# EAGLE board PiedPiperPCB (EAGLE 9.7.0)
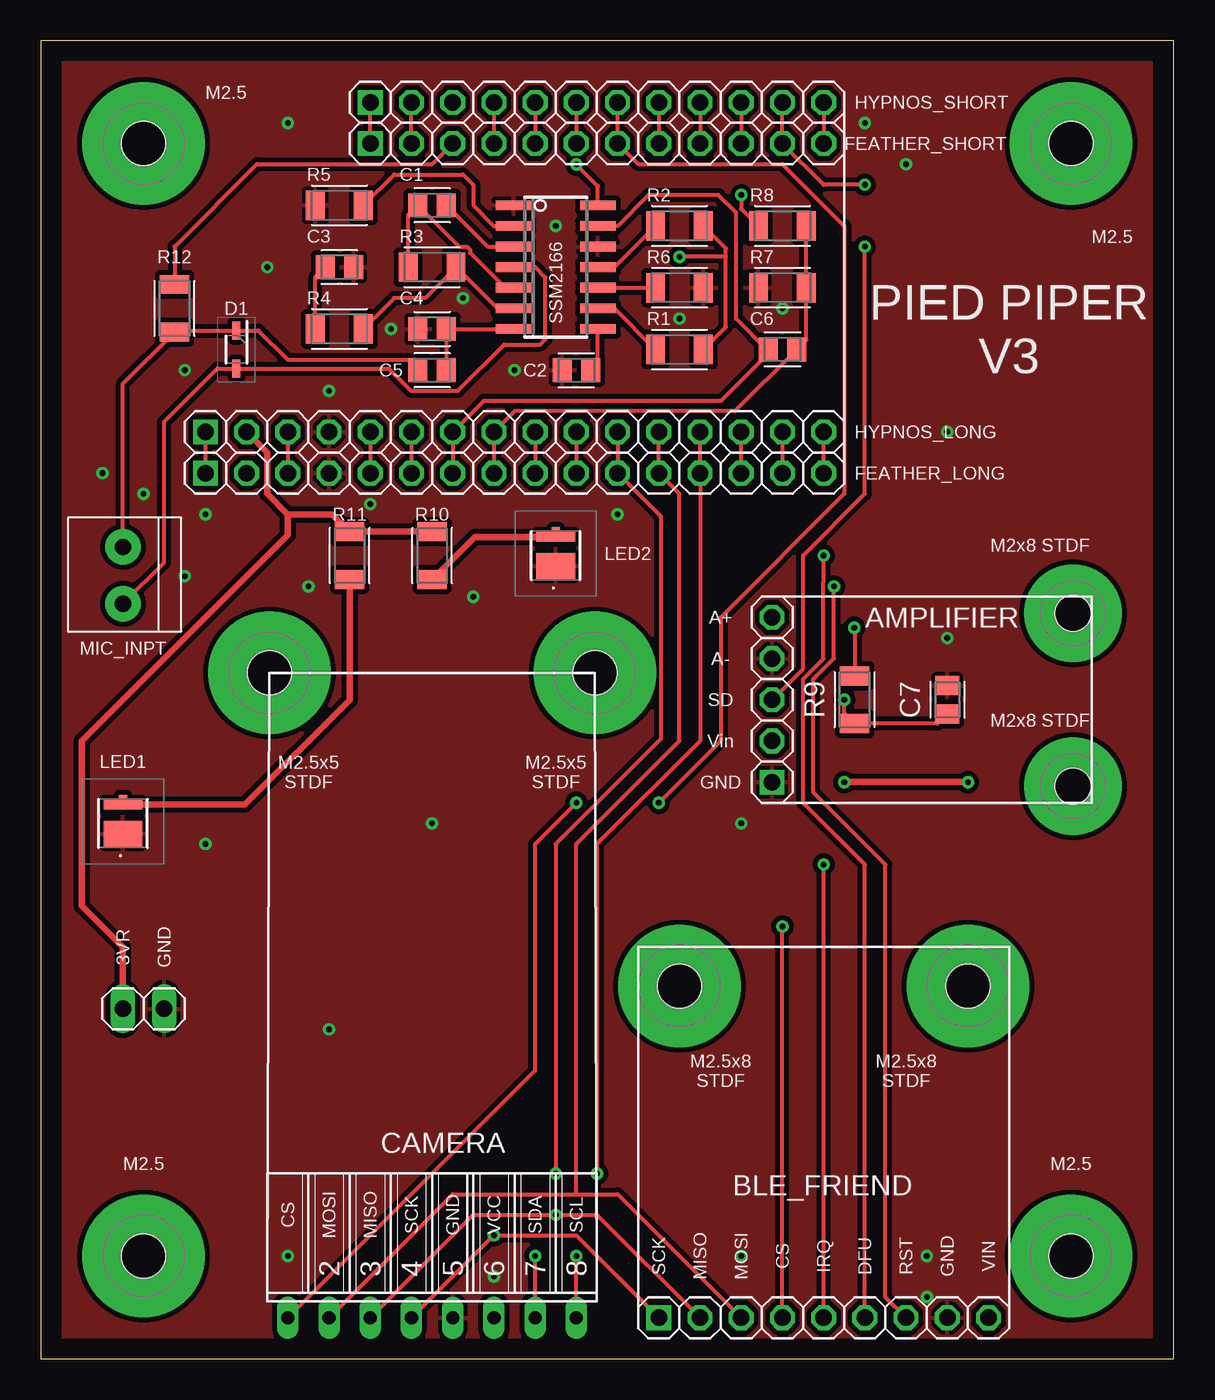
[diagram p0: board, top side]
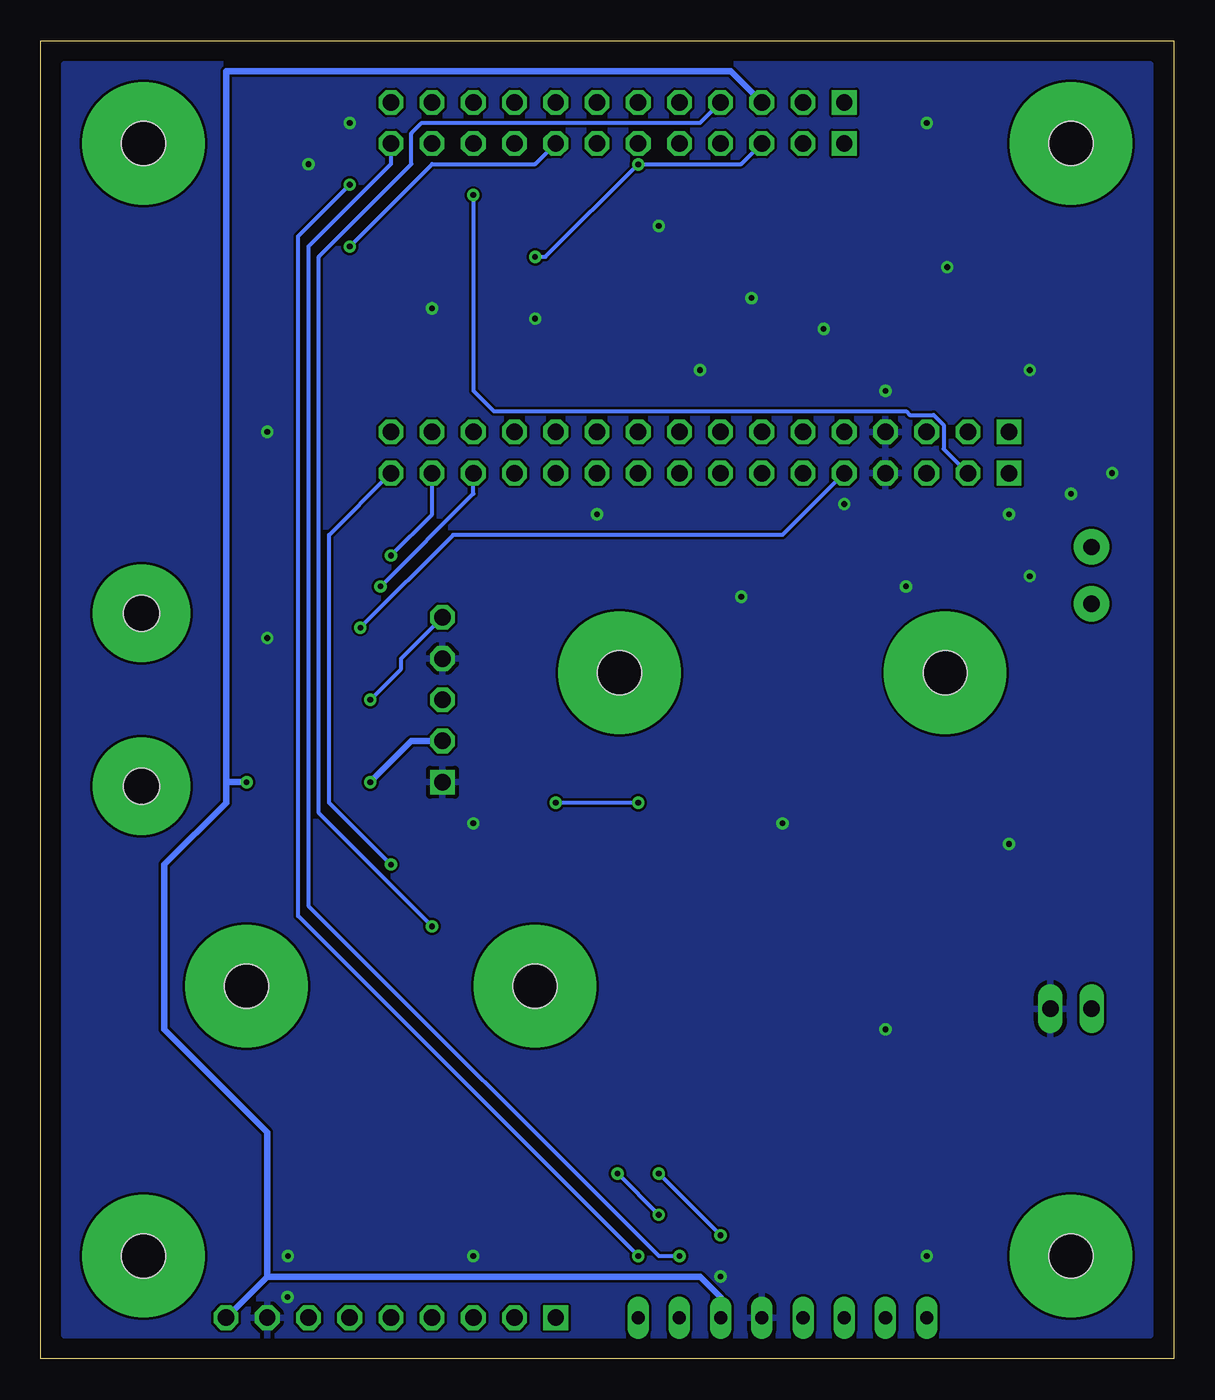
[diagram p1: board, bottom side, seen from below]

Size 69.85 x 81.28 mm. Coordinates in mm from the lower left corner, seen from the top.
Outline: 0,81.28 0,0 69.85,0 69.85,81.28 0,81.28
Copper layers (1*16): Top 0.035mm / dielectric 1.5mm / Bottom 0.035mm
Design rules "default": minimum track width 6mil, minimum drill 0.35mm, track to track 6mil, track to pad 6mil, pad to pad 6mil, via to via 6mil, smd to smd 6mil, copper to edge 40mil, drill to drill 6mil, minimum pad ring 10mil, minimum via ring 8mil, stop-mask expansion 4mil, vias tented up to drill 0mil, thermal gap 10mil

## Footprints (pad centres in the part's own frame; a part is rotated, then mirrored left to right if it is on the bottom)
1X02 = drill 1.016 long: 1 -1.27,0; 2 1.27,0
1X05-S = drill 1.016 square: 1 -5.08,0 | drill 1.016 octagon: 2 -2.54,0; 3 0,0; 4 2.54,0; 5 5.08,0
1X09-S = drill 1.016 square: 1 -10.16,0 | drill 1.016 octagon: 2 -7.62,0; 3 -5.08,0; 4 -2.54,0; 5 0,0; 6 2.54,0; 7 5.08,0; 8 7.62,0; 9 10.16,0
CAPC2012X110 = smd 1.165 x 1.465: 1 -0.875,0; 2 0.875,0
FE08W = drill 0.813 long: 1 -8.89,0; 2 -6.35,0; 3 -3.81,0; 4 -1.27,0; 5 1.27,0; 6 3.81,0; 7 6.35,0; 8 8.89,0
SOD2613X100N = smd 1.1 x 0.5: 1 -1.175,0; 2 1.175,0
1X16-S = drill 1.016 square: 1 -19.05,0 | drill 1.016 octagon: 2 -16.51,0; 3 -13.97,0; 4 -11.43,0; 5 -8.89,0; 6 -6.35,0; 7 -3.81,0; 8 -1.27,0; 9 1.27,0; 10 3.81,0; 11 6.35,0; 12 8.89,0; 13 11.43,0; 14 13.97,0; 15 16.51,0; 16 19.05,0
1X12-S = drill 1.016 square: 1 -13.97,0 | drill 1.016 octagon: 2 -11.43,0; 3 -8.89,0; 4 -6.35,0; 5 -3.81,0; 6 -1.27,0; 7 1.27,0; 8 3.81,0; 9 6.35,0; 10 8.89,0; 11 11.43,0; 12 13.97,0
MP3030120H2290 = smd 1.6 x 2.4: 1 -0.65,0 | smd 0.6 x 2.4: 2 1.15,0 | smd 0.3 x 0.5: 3 1.6,0
STANDOFF_HEX_MALE-FEMALE_500X500_M2.5X0.45_MTGP755H270 = drill 2.7 pad 7.55: 1 0,0 | hole 2.7: 0,0
1X2-3.5MM = drill 1 pad 2.184: 1 1.8,0; 2 -1.7,0
SO14 = smd 0.6 x 2.2: 1 -3.81,-2.6; 2 -2.54,-2.6; 3 -1.27,-2.6; 4 0,-2.6; 5 1.27,-2.6; 6 2.54,-2.6; 7 3.81,-2.6; 8 3.81,2.6; 9 2.54,2.6; 10 1.27,2.6; 11 0,2.6; 12 -1.27,2.6; 13 -2.54,2.6; 14 -3.81,2.6
STANDOFF_HEX_MALE-FEMALE_500X800_M2.5X0.45_MTGP755H270 = drill 2.7 pad 7.55: 1 0,0 | hole 2.7: 0,0
STANDOFF_HEX_MALE-FEMALE_400X800_M2X0.4_MTGP600H220 = drill 2.2 pad 6: 1 0,0 | hole 2.2: 0,0
RESC3216X70 = smd 1.165 x 1.815: 1 -1.475,0; 2 1.475,0

## Placement (x,y rotation side)
3VR  [1X02]  6.35,21.59 0 top
AMPLIFIER  [1X05-S]  45.09,40.64 90 top
BLE_FRIEND  [1X09-S]  48.26,2.54 0 top
C1  [CAPC2012X110]  24.13,71.12 0 top
C2  [CAPC2012X110]  33.02,60.96 180 top
C3  [CAPC2012X110]  18.41,67.31 0 top
C4  [CAPC2012X110]  24.13,63.5 180 top
C5  [CAPC2012X110]  24.13,60.96 0 top
C6  [CAPC2012X110]  45.72,62.23 0 top
C7  [CAPC2012X110]  55.88,40.64 90 top
CAMERA  [FE08W]  24.13,2.54 0 top
D1  STS321033B100  [SOD2613X100N]  12.06,62.23 270 top
FEATHER_LONG  [1X16-S]  29.21,54.61 0 top
FEATHER_SHORT  [1X12-S]  34.29,74.93 0 top
HYPNOS_LONG  [1X16-S]  29.21,57.15 0 top
HYPNOS_SHORT  [1X12-S]  34.29,77.47 0 top
LED1  MP-3030-120H-22-90  [MP3030120H2290]  5.08,33.02 90 top
LED2  MP-3030-120H-22-90  [MP3030120H2290]  31.75,49.53 90 top
M2.5_STDF_1  STANDOFF_M/F_M2.5_5MM  [STANDOFF_HEX_MALE-FEMALE_500X500_M2.5X0.45_MTGP755H270]  14.1,42.29 270 top
M2.5_STDF_2  STANDOFF_M/F_M2.5_5MM  [STANDOFF_HEX_MALE-FEMALE_500X500_M2.5X0.45_MTGP755H270]  34.16,42.29 270 top
MIC_INPT  1X2-3.5MM  [1X2-3.5MM]  5.08,48.26 90 top
MICROPHONE_PREAMP  SSM2166S  [SO14]  31.75,67.31 270 top
MP3  STANDOFF_M/F_M2.5_8MM  [STANDOFF_HEX_MALE-FEMALE_500X800_M2.5X0.45_MTGP755H270]  57.15,22.99 270 top
MP4  STANDOFF_M/F_M2.5_8MM  [STANDOFF_HEX_MALE-FEMALE_500X800_M2.5X0.45_MTGP755H270]  39.37,22.99 270 top
MP5  STANDOFF_M/F_M2_8MM  [STANDOFF_HEX_MALE-FEMALE_400X800_M2X0.4_MTGP600H220]  63.63,35.31 90 top
MP6  STANDOFF_M/F_M2_8MM  [STANDOFF_HEX_MALE-FEMALE_400X800_M2X0.4_MTGP600H220]  63.63,45.97 90 top
MP7  STANDOFF_M/F_M2.5_5MM  [STANDOFF_HEX_MALE-FEMALE_500X500_M2.5X0.45_MTGP755H270]  63.5,6.35 0 top
MP8  STANDOFF_M/F_M2.5_5MM  [STANDOFF_HEX_MALE-FEMALE_500X500_M2.5X0.45_MTGP755H270]  6.35,6.35 0 top
MP9  STANDOFF_M/F_M2.5_5MM  [STANDOFF_HEX_MALE-FEMALE_500X500_M2.5X0.45_MTGP755H270]  6.35,74.93 0 top
MP10  STANDOFF_M/F_M2.5_5MM  [STANDOFF_HEX_MALE-FEMALE_500X500_M2.5X0.45_MTGP755H270]  63.5,74.93 0 top
R1  [RESC3216X70]  39.37,62.23 180 top
R2  [RESC3216X70]  39.37,69.85 180 top
R3  [RESC3216X70]  24.13,67.31 180 top
R4  [RESC3216X70]  18.41,63.5 180 top
R5  [RESC3216X70]  18.41,71.12 180 top
R6  [RESC3216X70]  39.37,66.04 0 top
R7  [RESC3216X70]  45.72,66.04 0 top
R8  [RESC3216X70]  45.72,69.85 180 top
R9  [RESC3216X70]  50.16,40.64 90 top
R10  [RESC3216X70]  24.13,49.53 270 top
R11  [RESC3216X70]  19.05,49.53 270 top
R12  [RESC3216X70]  8.26,64.77 270 top

## Library data of the parts
3VR = pinhead
AMPLIFIER BLE_FRIEND FEATHER_LONG FEATHER_SHORT HYPNOS_LONG HYPNOS_SHORT = pinhead-2
C1-C7 = Capacitor; CATEGORY: Capacitor
CAMERA = con-lsta; OC_FARNELL: unknown; OC_NEWARK: unknown
D1 = SamacSys_Parts; DESCRIPTION: ESD Suppressors / TVS Diodes TVS ESD SOD-323 3.3 V; HEIGHT: 1mm; MANUFACTURER_NAME: Eaton; MANUFACTURER_PART_NUMBER: STS321033B100
LED1 LED2 = SamacSys_Parts; DESCRIPTION: High Power LEDs - White White 2200K ,90CRI; HEIGHT: 0.71mm; MANUFACTURER_NAME: Luminus Devices Inc.; MANUFACTURER_PART_NUMBER: MP-3030-120H-22-90; MOUSER_PART_NUMBER: 896-MP303012H2290; MOUSER_PRICE-STOCK: https://www.mouser.co.uk/ProductDetail/Luminus-Devices/MP-3030-120H-22-90?qs=iLbezkQI%252BsghKpkN4HJWNA%3D%3D
M2.5_STDF_1 M2.5_STDF_2 MP3-MP10 = PCB-Fasteners_Hardware; CATEGORY: Standoff/Spacer; SUB-CATEGORY: Male-Female
MIC_INPT = adafruit
MICROPHONE_PREAMP = analog-devices; MF: ALTERA CORPORATION; MPN: SSM2166S-REEL; OC_FARNELL: 1424669; OC_NEWARK: 13B4818
R1-R12 = Resistor; CATEGORY: Resistor; SUB-CATEGORY: Fixed

## Nets
0/RX: BLE_FRIEND.7 FEATHER_LONG.14 HYPNOS_LONG.14
1/TX: BLE_FRIEND.6 FEATHER_LONG.15 HYPNOS_LONG.15
4: BLE_FRIEND.5 FEATHER_LONG.16 HYPNOS_LONG.16
5/(HYPNOS_3VR-CTRL): FEATHER_SHORT.10 HYPNOS_SHORT.10
6/(HYPNOS_5VR-CTRL): FEATHER_SHORT.9 HYPNOS_SHORT.9
9: AMPLIFIER.3 FEATHER_SHORT.8 HYPNOS_SHORT.8
10: CAMERA.1 FEATHER_SHORT.7 HYPNOS_SHORT.7
11/(HYPNOS_SD-CS): FEATHER_SHORT.6 HYPNOS_SHORT.6
12/(HYPNOS_INT): FEATHER_SHORT.5 HYPNOS_SHORT.5
13: BLE_FRIEND.4 FEATHER_SHORT.4 HYPNOS_SHORT.4
A0: FEATHER_LONG.5 HYPNOS_LONG.5 R9.2
A1: FEATHER_LONG.6 HYPNOS_LONG.6
A2: C6.1 FEATHER_LONG.7 HYPNOS_LONG.7 MICROPHONE_PREAMP.13
A3: C6.2 FEATHER_LONG.8 HYPNOS_LONG.8 R7.2 R8.1
A4: FEATHER_LONG.9 HYPNOS_LONG.9
A5: FEATHER_LONG.10 HYPNOS_LONG.10
AVGCAP: C2.1 MICROPHONE_PREAMP.8
BAT: FEATHER_SHORT.1 HYPNOS_SHORT.1
BUFOUT: C1.1 MICROPHONE_PREAMP.5 R3.2
COMP: MICROPHONE_PREAMP.10 R6.1
EN: FEATHER_SHORT.2 HYPNOS_SHORT.2
FEATHER_3V: FEATHER_LONG.2 R8.2
FEATHER_5V: FEATHER_SHORT.3 MICROPHONE_PREAMP.14 R1.1 R2.1 R12.1
FEATHER_AREF: FEATHER_LONG.3 HYPNOS_LONG.3
GND: 3VR.2 AMPLIFIER.1 AMPLIFIER.4 BLE_FRIEND.8 C2.2 C3.2 C4.2 C7.2 CAMERA.5 FEATHER_LONG.4 HYPNOS_LONG.4 LED1.1 LED2.1 MICROPHONE_PREAMP.1 MICROPHONE_PREAMP.12 R5.2 R6.2 R7.1
HYPNOS_3VR: 3VR.1 HYPNOS_LONG.2 R10.1 R11.1
HYPNOS_5VR: AMPLIFIER.2 BLE_FRIEND.9 CAMERA.6 HYPNOS_SHORT.3
IN+: C4.1 C5.2 MICROPHONE_PREAMP.7
IN-: MICROPHONE_PREAMP.6 R3.1 R4.1
MIC+: C5.1 D1.1 MIC_INPT.1 R12.2
MIC-: D1.2 MIC_INPT.2 MICROPHONE_PREAMP.4
MISO: BLE_FRIEND.2 CAMERA.3 FEATHER_LONG.13 HYPNOS_LONG.13
MOSI: BLE_FRIEND.3 CAMERA.2 FEATHER_LONG.12 HYPNOS_LONG.12
N$1: LED1.2 LED1.3 R11.2
N$8: C3.1 R4.2
N$14: AMPLIFIER.5 C7.1 R9.1
N$15: LED2.2 LED2.3 R10.2
RGAIN: MICROPHONE_PREAMP.2 R5.1
RNOISE: MICROPHONE_PREAMP.9 R1.2
RROT: MICROPHONE_PREAMP.11 R2.2
RST: FEATHER_LONG.1 HYPNOS_LONG.1
SCK: BLE_FRIEND.1 CAMERA.4 FEATHER_LONG.11 HYPNOS_LONG.11
SCL: CAMERA.8 FEATHER_SHORT.11 HYPNOS_SHORT.11
SDA: CAMERA.7 FEATHER_SHORT.12 HYPNOS_SHORT.12
VCAIN: C1.2 MICROPHONE_PREAMP.3

## Tracks (layer width: path | path; a pad name or v marks a point on that pad's centre or on a via)
0/RX  (via drill 0.35)
  Top 0.254: FEATHER_LONG.14 HYPNOS_LONG.14 | BLE_FRIEND.7 52.07,3.81 52.07,30.48 47.62,34.92 47.62,41.91 48.9,43.18 v48.9,47.62
  Bottom 0.254: v48.9,47.62 43.18,53.34 FEATHER_LONG.14
1/TX  (via drill 0.35)
  Top 0.254: HYPNOS_LONG.15 FEATHER_LONG.15 | BLE_FRIEND.6 50.8,30.48 46.99,34.29 46.99,41.91 48.24,43.16 48.24,47.9 48.26,47.92 v48.26,49.53
  Bottom 0.254: v48.26,49.53 45.72,52.07 FEATHER_LONG.15
4  (via drill 0.35)
  Top 0.254: FEATHER_LONG.16 HYPNOS_LONG.16 | BLE_FRIEND.5 v48.26,30.48
  Bottom 0.254: v48.26,30.48 52.07,34.29 52.07,50.8 FEATHER_LONG.16
5/(HYPNOS_3VR-CTRL)
  Top 0.254: HYPNOS_SHORT.10 FEATHER_SHORT.10
6/(HYPNOS_5VR-CTRL)
  Top 0.254: HYPNOS_SHORT.9 FEATHER_SHORT.9
9  (via drill 0.35)
  Top 0.254: HYPNOS_SHORT.8 FEATHER_SHORT.8 | AMPLIFIER.3 46.99,42.55 46.99,49.53 50.8,53.34 v50.8,68.58
  Bottom 0.254: v50.8,68.58 45.72,73.66 39.37,73.66 FEATHER_SHORT.8
10  (via drill 0.35)
  Top 0.254: HYPNOS_SHORT.7 FEATHER_SHORT.7 36.83,73.66 45.72,73.66 49.53,69.85 49.53,53.34 41.91,45.72 41.91,38.1 v38.1,34.29 | CAMERA.1 30.48,17.78 30.48,31.75 v33.02,34.29
  Bottom 0.254: v33.02,34.29 v38.1,34.29
11/(HYPNOS_SD-CS)
  Top 0.254: HYPNOS_SHORT.6 FEATHER_SHORT.6
12/(HYPNOS_INT)
  Top 0.254: HYPNOS_SHORT.5 FEATHER_SHORT.5
13  (via drill 0.35)
  Top 0.254: HYPNOS_SHORT.4 FEATHER_SHORT.4 | BLE_FRIEND.4 v45.72,26.67
  Bottom 0.254: v45.72,26.67 52.7,33.66 52.7,67.94 46.99,73.66 46.99,75.56 46.35,76.2 29.21,76.2 HYPNOS_SHORT.4
A0  (via drill 0.35)
  Top 0.254: HYPNOS_LONG.5 FEATHER_LONG.5 | v50.14,45.09 50.16,45.06 R9.2
  Bottom 0.254: FEATHER_LONG.5 24.13,50.8 44.43,50.8 v50.14,45.09
A1
  Top 0.254: HYPNOS_LONG.6 FEATHER_LONG.6
A2
  Top 0.254: MICROPHONE_PREAMP.13 35.56,69.85 37.47,71.75 41.77,71.75 42.86,70.66 42.86,64.14 44.77,62.23 C6.1 44.84,61.99 41.91,59.05 27.3,59.05 HYPNOS_LONG.7 FEATHER_LONG.7
A3
  Top 0.254: R8.1 R7.2 47.2,62.83 C6.2 42.78,58.42 29.21,58.42 HYPNOS_LONG.8 FEATHER_LONG.8
A4
  Top 0.254: HYPNOS_LONG.9 FEATHER_LONG.9
A5
  Top 0.254: HYPNOS_LONG.10 FEATHER_LONG.10
AVGCAP
  Top 0.254: C2.1 34.35,61.41 MICROPHONE_PREAMP.8
BAT
  Top 0.254: FEATHER_SHORT.1 HYPNOS_SHORT.1
BUFOUT
  Top 0.254: MICROPHONE_PREAMP.5 28.62,66.04 26.47,68.2 26.47,68.4 26.3,68.56 25.82,68.56 C1.1 22.66,70.52 R3.2
COMP
  Top 0.254: MICROPHONE_PREAMP.10 R6.1
EN
  Top 0.254: FEATHER_SHORT.2 HYPNOS_SHORT.2
FEATHER_3V  (via drill 0.35)
  Top 0.254: v43.18,71.75 43.18,70.92 R8.2
  Bottom 0.254: v43.18,71.75 43.18,59.69 41.91,58.42 16.51,58.42 16.28,58.19 14.81,58.19 14.2,57.58 14.2,56.11 FEATHER_LONG.2
FEATHER_5V  (via drill 0.35)
  Top 0.254: FEATHER_SHORT.3 24.13,73.66 13.34,73.66 8.26,68.58 R12.1 | R1.1 42.23,63.61 42.23,67.94 | 42.23,67.94 42.23,68.47 R2.1 | 42.23,67.94 v39.37,67.94 | MICROPHONE_PREAMP.14 34.35,72.31 v33.02,73.64
  Bottom 0.254: FEATHER_SHORT.3 26.67,73.66 33.02,73.66 | v39.37,67.94 38.73,67.94 33.02,73.66 | v33.02,73.64 33.02,73.66
FEATHER_AREF
  Top 0.254: HYPNOS_LONG.3 FEATHER_LONG.3
GND  (via drill 0.35)
  other vias: 13.97,67.31 26.04,65.41 21.59,63.5 29.21,60.96 39.37,64.14 31.75,69.85 53.34,73.66 55.88,57.15 55.88,44.45 43.18,33.02 26.67,46.99 10.16,31.75 8.89,48.26 10.16,52.07 6.35,53.34 3.81,54.61 8.89,60.96 15.24,76.2 50.8,76.2 45.72,64.77 43.18,6.35 54.61,6.35 27.94,5.08 15.24,6.35 17.78,20.32 24.13,33.02 20.32,52.7 16.51,47.62 54.62,3.82 17.78,59.69 35.56,52.07
  pour Top (isolate 0.305): 1.4,1.4 68.45,1.4 68.45,79.88 1.4,79.88
  pour Bottom: 1.47,1.47 68.38,1.47 68.38,79.81 1.47,79.81
HYPNOS_3VR
  Top 0.406: R10.1 R11.1 17.98,52.07 15.24,52.07 | 15.24,52.07 13.97,53.34 13.97,55.88 HYPNOS_LONG.2 | 3VR.1 5.08,25.4 2.54,27.94 2.54,38.1 15.24,50.8 15.24,52.07
HYPNOS_5VR  (via drill 0.35)
  Top 0.406: v57.15,35.56 v49.53,35.56
  Bottom 0.406: CAMERA.6 27.94,3.81 29.21,5.08 55.88,5.08 | BLE_FRIEND.9 55.88,5.08 | 55.88,5.08 55.88,13.97 62.23,20.32 62.23,30.48 58.42,34.29 58.42,35.56 | 58.42,35.56 58.42,79.38 27.3,79.38 HYPNOS_SHORT.3 | AMPLIFIER.2 46.99,38.1 v49.53,35.56 | v57.15,35.56 58.42,35.56
IN+
  Top 0.254: MICROPHONE_PREAMP.7 C4.1 C5.2
IN-
  Top 0.254: MICROPHONE_PREAMP.6 28.14,64.77 R3.1 23.7,65.41 21.8,65.41 R4.1
MIC+
  Top 0.254: C5.1 22.62,61.59 15.24,61.59 13.43,63.41 D1.1 8.37,63.41 R12.2 5.08,60.12 MIC_INPT.1
MIC-
  Top 0.254: MICROPHONE_PREAMP.4 30.48,67.31 31.11,66.67 31.11,62.87 30.8,62.55 28.57,62.55 25.72,59.69 22.82,59.69 21.45,61.05 D1.2 10.89,61.05 7.62,57.78 7.62,49.1 MIC_INPT.2
MISO  (via drill 0.35)
  Top 0.254: HYPNOS_LONG.13 FEATHER_LONG.13 40.64,38.1 34.29,31.75 v34.29,11.43 | CAMERA.3 26.67,8.89 v31.75,8.89 34.29,8.89 BLE_FRIEND.2
  Bottom 0.254: v34.29,11.43 v31.75,8.89
MOSI
  Top 0.254: HYPNOS_LONG.12 FEATHER_LONG.12 39.37,53.34 39.37,38.1 33.02,31.75 33.02,10.16 | CAMERA.2 25.4,10.16 33.02,10.16 | 33.02,10.16 35.56,10.16 BLE_FRIEND.3
N$1
  Top 0.254: LED1.2 LED1.3
  Top 0.406: R11.2 19.05,40.64 12.58,34.17 LED1.2
N$8
  Top 0.254: R4.2 16.94,66.71 C3.1
N$14  (via drill 0.35)
  Top 0.254: C7.1 55.28,39.16 R9.1 49.53,39.8 v49.53,40.64
  Bottom 0.254: v49.53,40.64 47.62,42.55 47.62,43.18 AMPLIFIER.5
N$15
  Top 0.254: LED2.2 LED2.3
  Top 0.406: R10.2 26.75,50.68 LED2.2
RGAIN
  Top 0.254: MICROPHONE_PREAMP.2 27.94,69.85 26.67,71.12 26.67,72.39 26.04,73.03 21.8,73.03 R5.1
RNOISE
  Top 0.254: R1.2 35.35,64.77 MICROPHONE_PREAMP.9
RROT
  Top 0.254: R2.2 35.35,67.31 MICROPHONE_PREAMP.11
RST
  Top 0.254: HYPNOS_LONG.1 FEATHER_LONG.1
SCK  (via drill 0.35)
  Top 0.254: HYPNOS_LONG.11 FEATHER_LONG.11 38.22,51.95 38.22,38.22 31.75,31.75 v31.75,11.43 | CAMERA.4 v27.94,7.62 33.02,7.62 BLE_FRIEND.1
  Bottom 0.254: v27.94,7.62 v31.75,11.43
SCL  (via drill 0.35)
  Top 0.254: HYPNOS_SHORT.11 FEATHER_SHORT.11 48.26,72.39 v50.8,72.39 | CAMERA.8 v33.02,6.35
  Bottom 0.254: v33.02,6.35 53.98,27.3 53.98,69.22 v50.8,72.39
SDA  (via drill 0.35)
  Top 0.254: HYPNOS_SHORT.12 FEATHER_SHORT.12 | CAMERA.7 v30.48,6.35
  Bottom 0.254: v30.48,6.35 31.75,6.35 53.34,27.94 53.34,68.58 48.26,73.66 FEATHER_SHORT.12
VCAIN
  Top 0.254: C1.2 27.55,68.58 MICROPHONE_PREAMP.3

## Text on the board
tNames: M2.5 | M2.5 | SSM2166 | PIED PIPER / V3 | M2x8 STDF | A+ | A- | SD | M2x8 STDF | Vin | M2.5x5 / STDF | M2.5x5 / STDF | GND | GND | M2.5x8 / STDF | M2.5x8 / STDF | M2.5 | M2.5 | CS | MOSI | MISO | SCK | GND | VCC | SDA | SCL | SCK | MISO | MOSI | CS | IRQ | DFU | RST | GND | VIN